# Allegro board board6DFfils1.brd
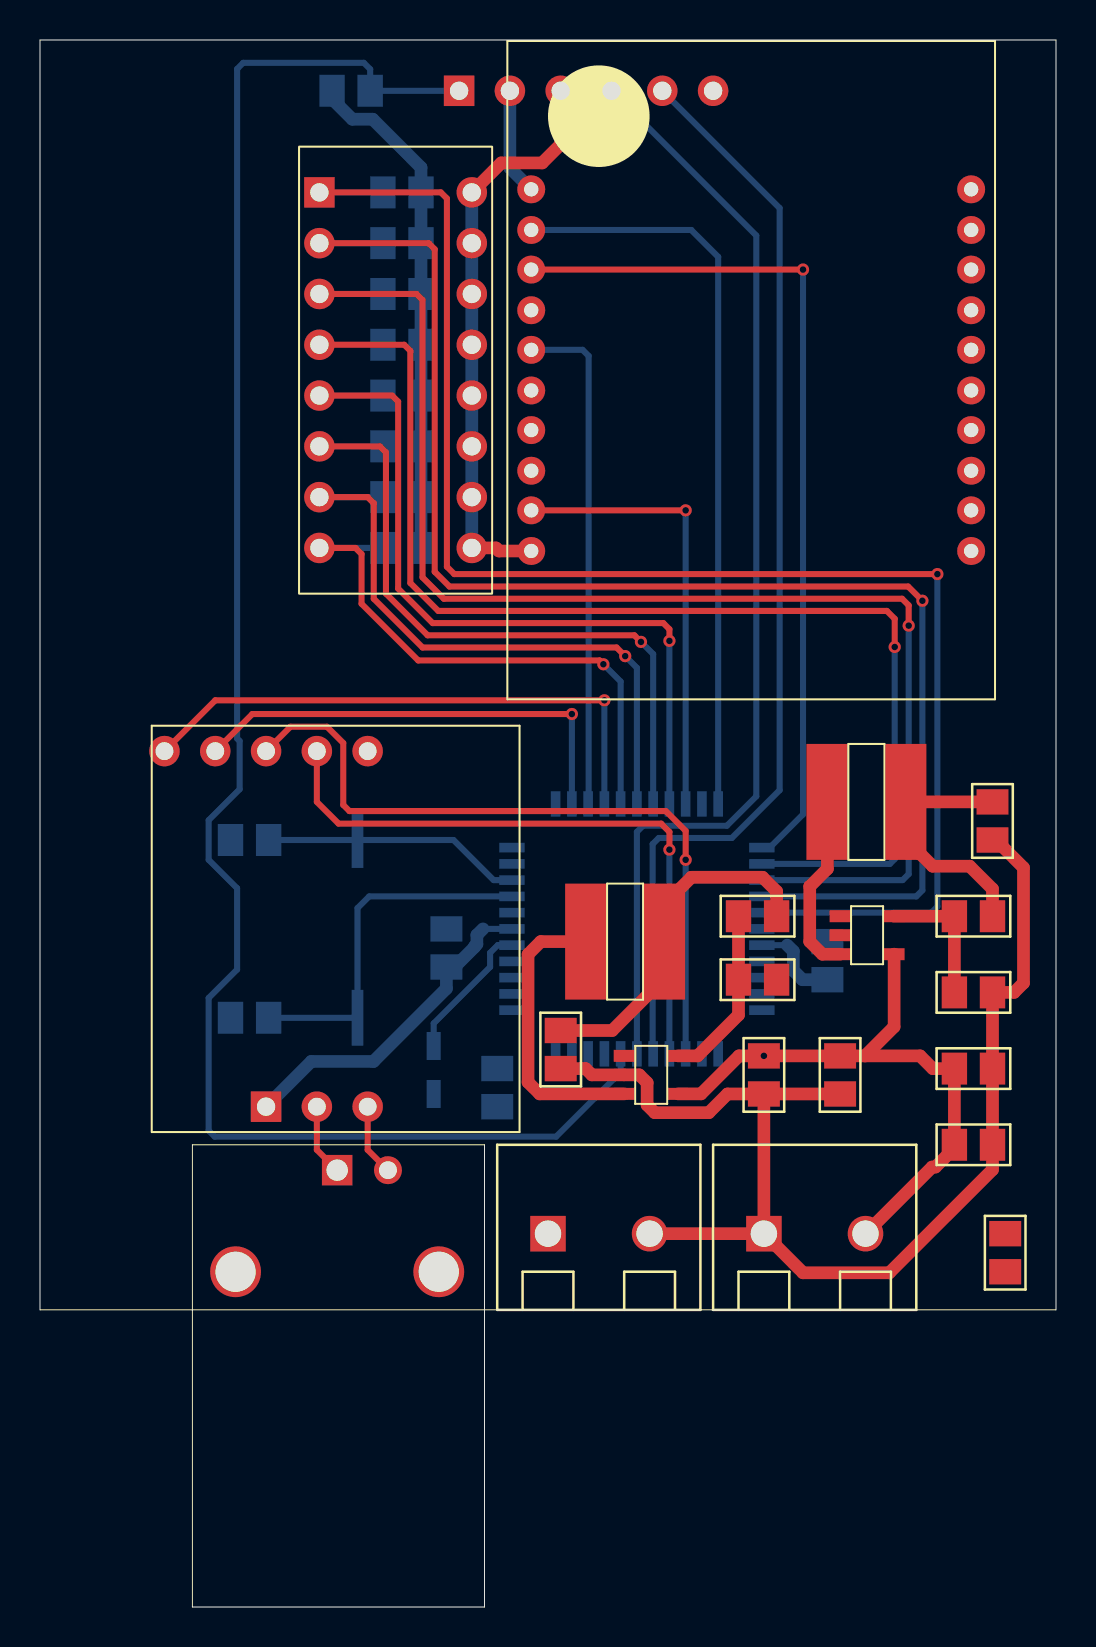
[diagram p0: board, top side]
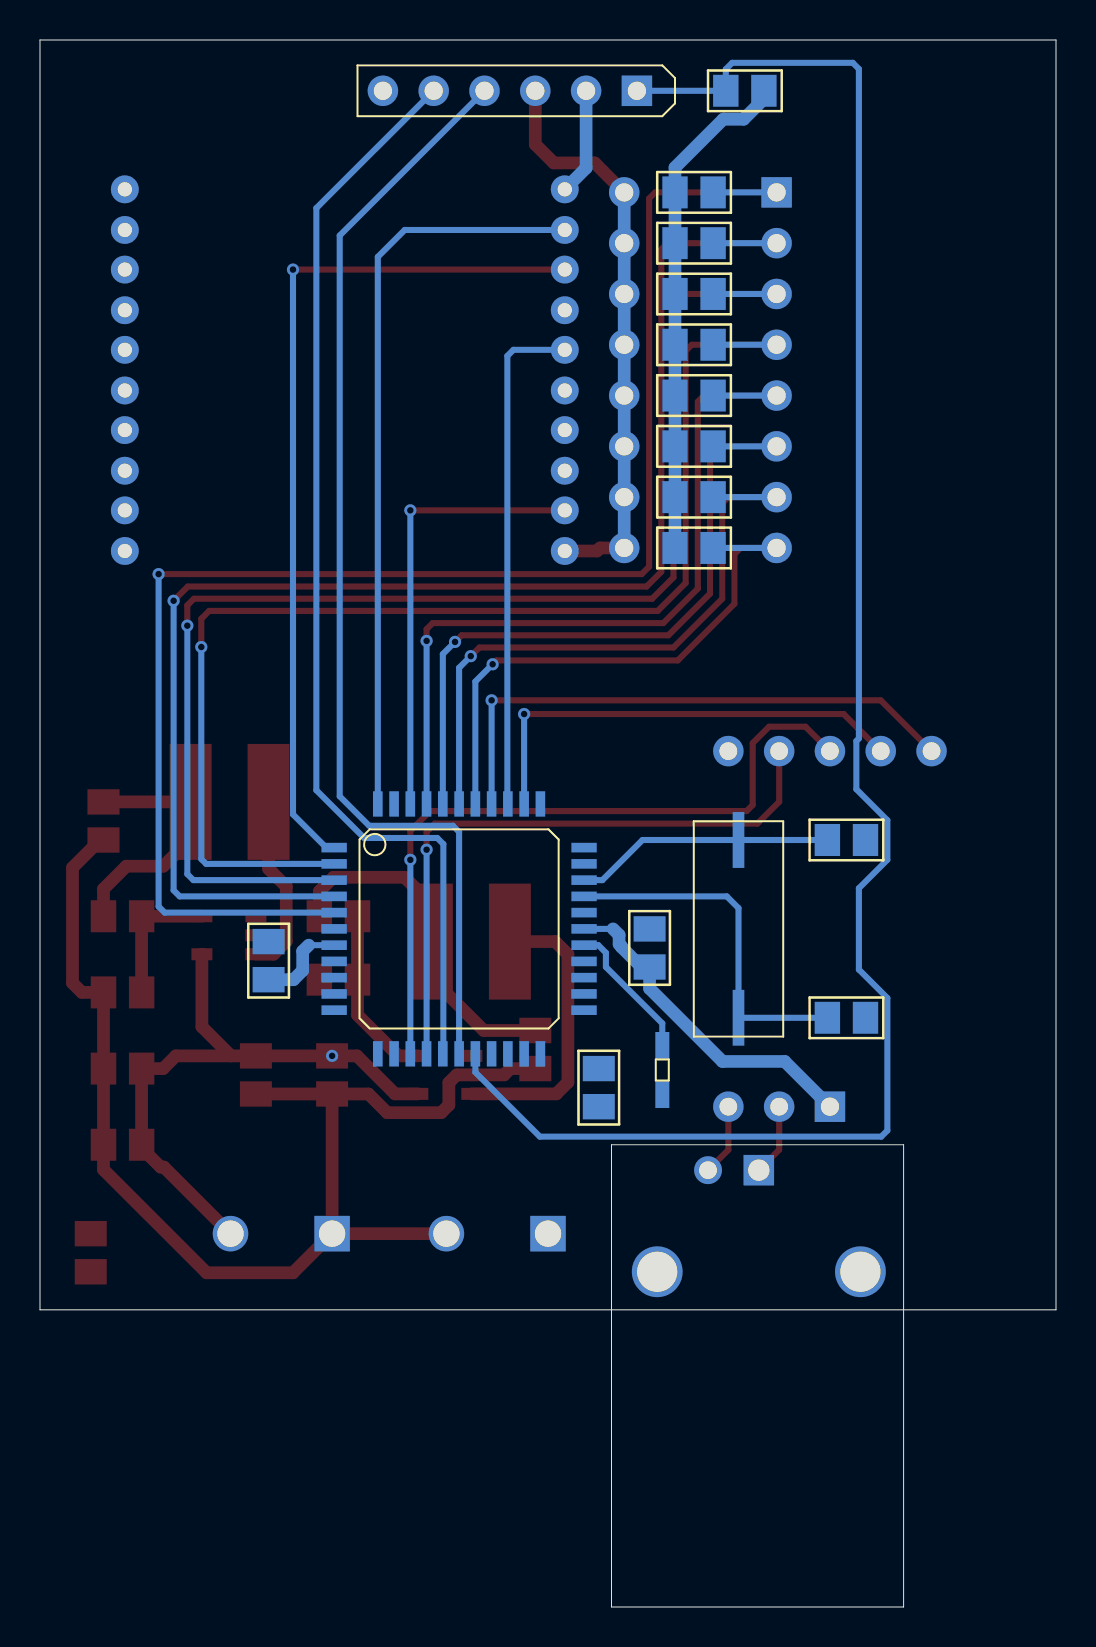
[diagram p1: board, bottom side, seen from below]

Outline 50.8 x 78.36 mm; copper layers: TOP, BOTTOM. Coordinates in mm from the lower left corner of the outline.
Outline path: 0,78.36 50.8,78.36 50.8,14.86 0,14.86 0,78.36

## Design rules (mm)
nets with their own width: min track width 0.635; nets 3.3V 5V 6A9V(PILE) GND N82912 N83047 N88127 N88155

## Placement (name value [footprint] x y rotation side)
C1  10uF  [C_0805]  47.62 26.92 180 top
C2  100nF  [C_0805]  47.62 23.11 180 top
C3  10uF  [C_0805]  47.62 38.35 90 top
C4  10uF  [C_0805]  36.2 25.65 90 top
C5  100nF  [C_0805]  40 25.65 90 top
C6  22uF  [C_0805]  26.04 26.92 90 top
C7  27pF  [C_0805]  9.52 29.46 0 bottom
C8  27pF  [C_0805]  9.52 38.35 0 bottom
C9  10uF  [C_0805]  22.86 26.92 270 bottom
C10  0.1 uF  [C_0805]  20.32 32 90 bottom
C11  0.1 uF  [C_0805]  39.37 31.37 90 bottom
D1  Vz 6V  [DIODESOD323]  19.68 25.65 90 bottom
J1  HEADER 2  [CONNECTEUR_2_200]  36.2 18.67 0 top
J2  Convertion Board  [CONDUCTIVITY_SENSOR]  5.59 23.75 90 top
J3  BNC au capteur  [CONNECTEUR_BNC]  7.62 23.11 270 top
J4  Xbee  [XBEE]  35.56 61.85 0 top
J5  Connecteur PicKit  [SIP6]  20.95 75.82 270 bottom
J6  contact eau  [CONNECTEUR_2_200]  25.4 18.67 0 top
L1  10uH  [BOBINE10U100MH]  39.37 40.26 0 top
L2  10uH  [BOBINE10U100MH]  27.3 33.27 0 top
R1  105K  [R_0805]  45.72 34.54 0 top
R2  20K  [R_0805]  47.62 30.73 180 top
R3  61.9K  [R_0805]  34.92 34.54 0 top
R4  20K  [R_0805]  36.83 31.37 180 top
R5  4.7K  [R_0805]  14.6 75.82 0 bottom
R6  10K  [R_0805]  48.26 18.67 270 top
R7  10K  [R_0805]  17.14 70.74 0 bottom
R8  10K  [R_0805]  17.14 68.2 0 bottom
R9  10K  [R_0805]  17.14 65.66 0 bottom
R10  10K  [R_0805]  17.14 63.12 0 bottom
R11  10K  [R_0805]  17.14 60.58 0 bottom
R12  10K  [R_0805]  17.14 58.04 0 bottom
R13  10K  [R_0805]  17.14 55.5 0 bottom
R14  10K  [R_0805]  17.14 52.96 0 bottom
SW1  SW DIP-8  [DIPSWITCH]  13.97 70.74 0 top
U1  LM104/TO  [TPS560200]  40 34.54 0 top
U2  LM104/TO  [TPS560200]  29.21 27.56 0 top
U3  PIC18F47J13  [PQFP44]  29.84 33.91 180 bottom
Y1  4Mhz CRYSTAL  [CRYSTAL_SMD]  15.87 33.91 270 bottom

## Library data of the parts
C1-C6 = C
C7-C9 = CAPACITOR NON-POL
C10 C11 = CAP NP
D1 = DIODE ZENER
J1 = HEADER 2_1
J2 = HEADER 3X2_3
J3 = BNC
J4 = HEADER 11X2_1
J5 = HEADER 6_0: User Part Number: ***
J6 = HEADER 2
L1 L2 = INDUCTOR
R1-R4 R6-R14 = R
R5 = RESISTOR
SW1 = SW DIP-8: User Part Number: ***
U1 U2 = LM104/TO_3
U3 = PIC16C67_2: Tolerance: ***; User Part Number: ***
Y1 = CRYSTAL

## Footprints (pads in the part's own frame, mm; a bottom-side part is the same pattern mirrored in y, then rotated)
BOBINE10U100MH
  rect 2.1x5.8 smd: 1(0,0) 2(3.9,0)
C_0805
  rect 1.27x1.6 smd: 1(0,0) 2(1.905,0)
CONDUCTIVITY_SENSOR
  rect 1.524x1.524 hole 0.914: 1(1.27,-5.715)
  round 1.524 hole 0.889: 2(1.27,-8.255) 3(1.27,-10.795) 4(19.05,-10.795) 5(19.05,-8.255) 6(19.05,-5.715) 7(19.05,-3.175) 8(19.05,-0.635)
CONNECTEUR_2_200
  rect 1.778x1.778 hole 1.321: 1(0,0)
  round 1.778 hole 1.321: 2(5.08,0)
CONNECTEUR_BNC
  round 2.54 hole 2.007: (6.35,12.319) (6.35,2.159)
  rect 1.524x1.524 hole 1.067: 1(1.27,7.239)
  round 1.397 hole 0.889: 2(1.27,9.779)
CRYSTAL_SMD
  rect 2.794x0.584 smd: 1(-4.445,0) 2(4.445,0)
DIODESOD323
  rect 1.4x0.7 smd: 1(0,0) 2(2.4,0)
DIPSWITCH
  rect 1.524x1.524 hole 0.914: 1(0,0)
  round 1.524 hole 0.914: 2(0,-2.54) 3(0,-5.08) 4(0,-7.62) 5(0,-10.16) 6(0,-12.7) 7(0,-15.24) 8(0,-17.78) 9(7.62,-17.78) 10(7.62,-15.24) 11(7.62,-12.7) 12(7.62,-10.16) 13(7.62,-7.62) 14(7.62,-5.08) 15(7.62,-2.54) 16(7.62,0)
PQFP44
  rect 1.27x0.483 smd: 1(-6.248,4.064) 2(-6.248,3.251) 3(-6.248,2.438) 4(-6.248,1.626) 5(-6.248,0.813) 6(-6.248,0) 7(-6.248,-0.813) 8(-6.248,-1.626) 9(-6.248,-2.438) 10(-6.248,-3.251) 11(-6.248,-4.064) 23(6.248,-4.064) 24(6.248,-3.251) 25(6.248,-2.438) 26(6.248,-1.626) 27(6.248,-0.813) 28(6.248,0) 29(6.248,0.813) 30(6.248,1.626) 31(6.248,2.438) 32(6.248,3.251) 33(6.248,4.064)
  rect 0.483x1.27 smd: 12(-4.064,-6.248) 13(-3.251,-6.248) 14(-2.438,-6.248) 15(-1.626,-6.248) 16(-0.813,-6.248) 17(0,-6.248) 18(0.813,-6.248) 19(1.626,-6.248) 20(2.438,-6.248) 21(3.251,-6.248) 22(4.064,-6.248) 34(4.064,6.248) 35(3.251,6.248) 36(2.438,6.248) 37(1.626,6.248) 38(0.813,6.248) 39(0,6.248) 40(-0.813,6.248) 41(-1.626,6.248) 42(-2.438,6.248) 43(-3.251,6.248) 44(-4.064,6.248)
R_0805
  rect 1.27x1.6 smd: 1(0,0) 2(1.905,0)
SIP6
  rect 1.524x1.524 hole 0.914: 1(0,0)
  round 1.524 hole 0.914: 2(0,-2.54) 3(0,-5.08) 4(0,-7.62) 5(0,-10.16) 6(0,-12.7)
TPS560200
  rect 1.05x0.6 smd: 1(0,0) 2(0,-0.95) 3(0,-1.9) 4(2.7,-1.9) 5(2.7,0)
XBEE
  round 1.397 hole 0.711: 1(-10.998,9.042) 2(-10.998,7.01) 3(-10.998,5.029) 4(-10.998,2.997) 5(-10.998,1.016) 6(-10.998,-1.016) 7(-10.998,-2.997) 8(-10.998,-5.029) 9(-10.998,-7.01) 10(-10.998,-9.042) 11(10.998,-9.042) 12(10.998,-7.01) 13(10.998,-5.029) 14(10.998,-2.997) 15(10.998,-1.016) 16(10.998,1.016) 17(10.998,2.997) 18(10.998,5.029) 19(10.998,7.01) 20(10.998,9.042)

## Nets
3.3V: C6.2 C10.1 C11.1 J2.1 J4.1 J5.2 L2.2 R3.2 R5.1 R6.1 R7.2 R8.2 R9.2 R10.2 R11.2 R12.2 R13.2 R14.2 U3.7(VDD1) U3.22(RA3) U3.28(VDD2)
5V: C3.2 L1.2 R1.2
GND: C1.1 C2.1 C3.1 C4.1 C5.1 C6.1 C7.1 C8.1 C9.2 C10.2 C11.2 J1.1 J2.4(GND) J4.10 J5.3 J6.2 R2.1 R4.1 SW1.9(B8) SW1.10(B7) SW1.11(B6) SW1.12(B5) SW1.13(B4) SW1.14(B3) SW1.15(B2) SW1.16(B1) U1.2(GND) U2.2(GND) U3.6(VSS1) U3.21(RA2) U3.29(VSS2)
6A9V(PILE): C1.2 C2.2 C4.2 C5.2 D1.1(CATHODE) J1.2 U1.4(VIN) U2.4(VIN)
CAPTEURRX: J2.6 U3.14(RB4)
CAPTEURTX: J2.5 U3.15(RB5)
CELL7: J2.7 U3.35(RC1)
CELL8: J2.8 U3.37(RC3/SCL1)
ENABLE POWER: U2.1(EN) U3.26(RE1)
ENABLE POWER5V: U1.1(EN) U3.25(RE0)
XBEEDIN: J4.3 U3.1(RC7)
XBEEDOUT: J4.2 U3.44(RC6)
XBEERESET: J4.5 U3.36(RC2)
XBEESLEEP: J4.9 U3.42(RC4/SDA1/SDI)
N45185: C9.1 U3.23(VDDCORE)
N45221: J5.5 U3.16(RB6)
N45265: J5.4 U3.17(RB7)
N45305: J5.1 R5.2 U3.18(M\C\L\R\)
N56544: R7.1 SW1.1(A1) U3.5(RD7)
N56546: R8.1 SW1.2(A2) U3.4(RD6)
N56548: R9.1 SW1.3(A3) U3.3(RD5)
N56550: R10.1 SW1.4(A4) U3.2(RD4)
N56552: R11.1 SW1.5(A5) U3.41(RD3)
N56554: R12.1 SW1.6(A6) U3.40(RD2)
N56556: R13.1 SW1.7(A7) U3.39(RD1/SDA2)
N56558: R14.1 SW1.8(A8) U3.38(RD0/SCL2)
N61373: J2.2 J3.1(CENTER)
N61405: J2.3 J3.2(SHIELD)
N78069: C7.2 U3.30(OSC1/RA7) Y1.2
N78169: C8.2 U3.31(OSC2/RA6) Y1.1
N80519: J6.1 R6.2 U3.9(RB1)
N81598: D1.2(ANODE) U3.27(RE2)
N82912: R3.1 R4.2 U2.5(VSENSE)
N83047: L2.1 U2.3(PH)
N88127: R1.1 R2.2 U1.5(VSENSE)
N88155: L1.1 U1.3(PH)

Pads without a net: J4 4 6 7 8 11 12 13 14 15 16 17 18 19 20; J5 6; U3 8 10 11 12 13 19 20 24 32 33 34 43

## Via types
v1: diameter 0.61, hole 0.33, TOP to BOTTOM, 16 vias

## Routing (per net, layer and track width the routed paths; a pad name or vN(x,y) marks a point on that pad's centre or on a via; arc(x,y) is an arc through that point)
3.3V: length 69.8
  TOP w0.635: C6.2 28.61,28.83 31.2,31.42 L2.2 31.2,35.12 32.57,36.49 36.13,36.49 36.83,35.79 R3.2
  BOTTOM w0.305: 22.15,33.91 U3.28 ; U3.7 37.36,33.1
  BOTTOM w0.635: 23.49,75.82 23.49,71.96 J4.1 ; C11.1 38.13,31.37 37.67,31.83 37.67,32.79 37.36,33.1 ; 22.15,33.91 21.84,33.6 21.84,33.15 21.73,33.04 21.73,33 20.73,32 C10.1 20.32,30.92 16.68,27.28 13.56,27.28 11.3,25.02 ; R14.2 R13.2 R12.2 R11.2 R10.2 R9.2 R8.2 R7.2 19.05,71.98 16.64,74.4 15.62,74.4 14.6,75.41 R5.1
5V: length 13
  TOP w0.635: R1.2 47.62,35.9 46.48,37.04 44.63,37.04 43.27,38.41 L1.2 C3.2
GND: length 90.4
  TOP w0.635: 26.04,75.82 26.04,73.14 25.11,72.21 23.06,72.21 SW1.16 ; C6.1 27.28,26.92 27.59,26.61 U2.2 29.97,26.61 30.36,26.22 30.36,25.1 30.74,24.72 33.44,24.72 34.37,25.65 C4.1 ; J1.1 J6.2 ; J1.1 C4.1 ; J1.1 38.15,16.71 42.47,16.71 47.62,21.87 C2.1 C1.1 R2.1 48.7,30.73 49.17,31.2 49.17,36.97 47.79,38.35 C3.1 ; J4.10 22.95,52.81 22.8,52.96 SW1.9 ; C4.1 C5.1
  BOTTOM w0.635: SW1.16 SW1.15 SW1.14 SW1.13 SW1.12 SW1.11 SW1.10 SW1.9
6A9V(PILE): length 30.7
  TOP w0.635: 41.25,27.56 42.71,29.01 U1.4 ; 41.25,27.56 44.01,27.56 44.64,26.92 C1.2 C2.2 45.72,22.95 44.77,22 44.61,22 J1.2 ; 41.25,27.56 C5.2 v1(36.2,27.56) 34.95,27.56 33.05,25.66 U2.4
CAPTEURRX: length 36.6
  TOP w0.305: 11.3,42.8 12.52,44.02 14.35,44.02 15.16,43.2 15.16,40.11 15.47,39.8 31.29,39.8 32.28,38.81 v1(32.28,37.36)
  BOTTOM w0.305: v1(32.28,37.36) U3.14
CAPTEURTX: length 31.9
  TOP w0.305: J2.5 13.84,40.26 14.93,39.17 31.06,39.17 31.47,38.76 v1(31.47,37.87)
  BOTTOM w0.305: v1(31.47,37.87) U3.15
CELL7: length 23.1
  TOP w0.305: J2.7 10.62,44.65 v1(26.59,44.65)
  BOTTOM w0.305: v1(26.59,44.65) U3.35
CELL8: length 28.2
  TOP w0.305: v1(28.22,45.34) 8.76,45.34 v1(6.22,42.8)
  BOTTOM w0.305: v1(28.22,45.34) U3.37
XBEEDIN: length 43.6
  TOP w0.305: J4.3 v1(38.15,66.88)
  BOTTOM w0.305: v1(38.15,66.88) 38.15,39.64 36.49,37.97 U3.1
XBEEDOUT: length 37.3
  BOTTOM w0.305: U3.44 33.91,67.51 32.56,68.86 J4.2
XBEERESET: length 25.4
  BOTTOM w0.305: J4.5 27.13,62.87 27.43,62.56 27.43,40.18 U3.36
XBEESLEEP: length 22.4
  TOP w0.305: J4.9 v1(32.28,54.84)
  BOTTOM w0.305: v1(32.28,54.84) U3.42
N45221: length 55.4
  BOTTOM w0.305: J5.5 36.98,69.95 36.98,40.85 34.59,38.46 30.94,38.46 30.63,38.15 30.63,27.69 U3.16
N45265: length 56.1
  BOTTOM w0.305: U3.17 29.84,38.76 30.15,39.07 34.34,39.07 35.81,40.54 35.81,68.58 J5.4
N45305: length 90.4
  BOTTOM w0.305: J5.1 R5.2 16.51,76.9 16.19,77.22 10.16,77.22 9.86,76.91 9.86,43.43 9.98,43.3 9.98,40.89 8.43,39.34 8.43,37.36 9.86,35.94 9.86,31.88 8.43,30.45 8.43,23.83 8.74,23.52 25.81,23.52 29.03,26.75 U3.18
N56544: length 78.3
  TOP w0.305: v1(44.87,51.65) 20.71,51.65 20.35,52.02 20.35,70.43 20.04,70.74 SW1.1
  BOTTOM w0.305: v1(44.87,51.65) 44.87,35.03 44.56,34.72 U3.5 ; SW1.1 R7.1
N56546: length 72.8
  TOP w0.305: v1(44.12,50.32) 43.41,51.03 20.47,51.03 19.74,51.77 19.74,67.89 19.43,68.2 SW1.2
  BOTTOM w0.305: U3.4 43.81,35.53 44.12,35.84 v1(44.12,50.32) ; R8.1 SW1.2
N56548: length 68.1
  TOP w0.305: SW1.3 18.82,65.66 19.13,65.35 19.13,51.49 20.19,50.42 43.1,50.42 43.43,50.09 v1(43.43,49.07)
  BOTTOM w0.305: v1(43.43,49.07) 43.43,36.65 43.13,36.35 U3.3 ; R9.1 SW1.3
N56550: length 63.2
  TOP w0.305: SW1.4 18.21,63.12 18.52,62.81 18.52,51.21 19.91,49.81 42.34,49.81 42.74,49.42 v1(42.74,48.01)
  BOTTOM w0.305: v1(42.74,48.01) 42.74,37.4 42.49,37.16 U3.2 ; R10.1 SW1.4
N56552: length 39.7
  TOP w0.305: v1(31.47,48.31) 31.47,48.9 31.17,49.2 19.63,49.2 17.91,50.93 17.91,60.27 17.6,60.58 SW1.5
  BOTTOM w0.305: v1(31.47,48.31) U3.41 ; R11.1 SW1.5
N56554: length 35.8
  TOP w0.305: SW1.6 16.99,58.04 17.3,57.73 17.3,50.67 19.38,48.59 29.72,48.59 v1(30.05,48.26)
  BOTTOM w0.305: U3.40 30.66,47.65 v1(30.05,48.26) ; R12.1 SW1.6
N56556: length 32.2
  TOP w0.305: v1(29.26,47.55) 28.83,47.98 19.13,47.98 16.69,50.42 16.69,55.19 16.38,55.5 SW1.7
  BOTTOM w0.305: 29.84,40.16 29.84,46.96 v1(29.26,47.55) ; R13.1 SW1.7
N56558: length 28.6
  TOP w0.305: SW1.8 15.77,52.96 16.08,52.65 16.08,50.16 18.91,47.33 27.98,47.33 v1(28.17,47.14)
  BOTTOM w0.305: U3.38 29.03,46.28 v1(28.17,47.14) ; SW1.8 R14.1
N61373: length 3.6
  TOP w0.305: J3.1 13.84,22.86 J2.2
N61405: length 3.6
  TOP w0.305: 16.38,25.02 16.38,22.86 17.4,21.84
N78069: length 17.9
  BOTTOM w0.305: U3.30 16.46,35.53 15.87,34.95 Y1.2 C7.2
N78169: length 13
  BOTTOM w0.305: C8.2 20.68,38.35 22.68,36.35 U3.31
N81598: length 7.1
  BOTTOM w0.305: U3.27 22.89,33.1 22.5,32.71 22.5,32 19.68,29.18 D1.2
N82912: length 8.8
  TOP w0.635: U2.5 32.88,27.56 34.92,29.6 R4.2 R3.1
N83047: length 14.6
  TOP w0.635: L2.1 25.04,33.27 24.4,32.64 24.4,26.24 24.98,25.66 U2.3
N88127: length 6.8
  TOP w0.635: U1.5 R1.1 R2.2
N88155: length 9.1
  TOP w0.635: L1.1 39.37,36.91 38.49,36.03 38.49,33.28 39.12,32.64 U1.3
